# Altium PCB ProcessorBoard_STM32F103C.PcbDoc
Units mm, origin at the board's own origin, x right, y up, seen from the top; angles counter-clockwise.
Board outline 44 x 44 mm, 2 copper layers (Top Layer, Bottom Layer), stack 1.571 mm thick; 29 components, 50 nets, 159 pads, 22 vias.
Unrouted connection lines stored in the file: 12.
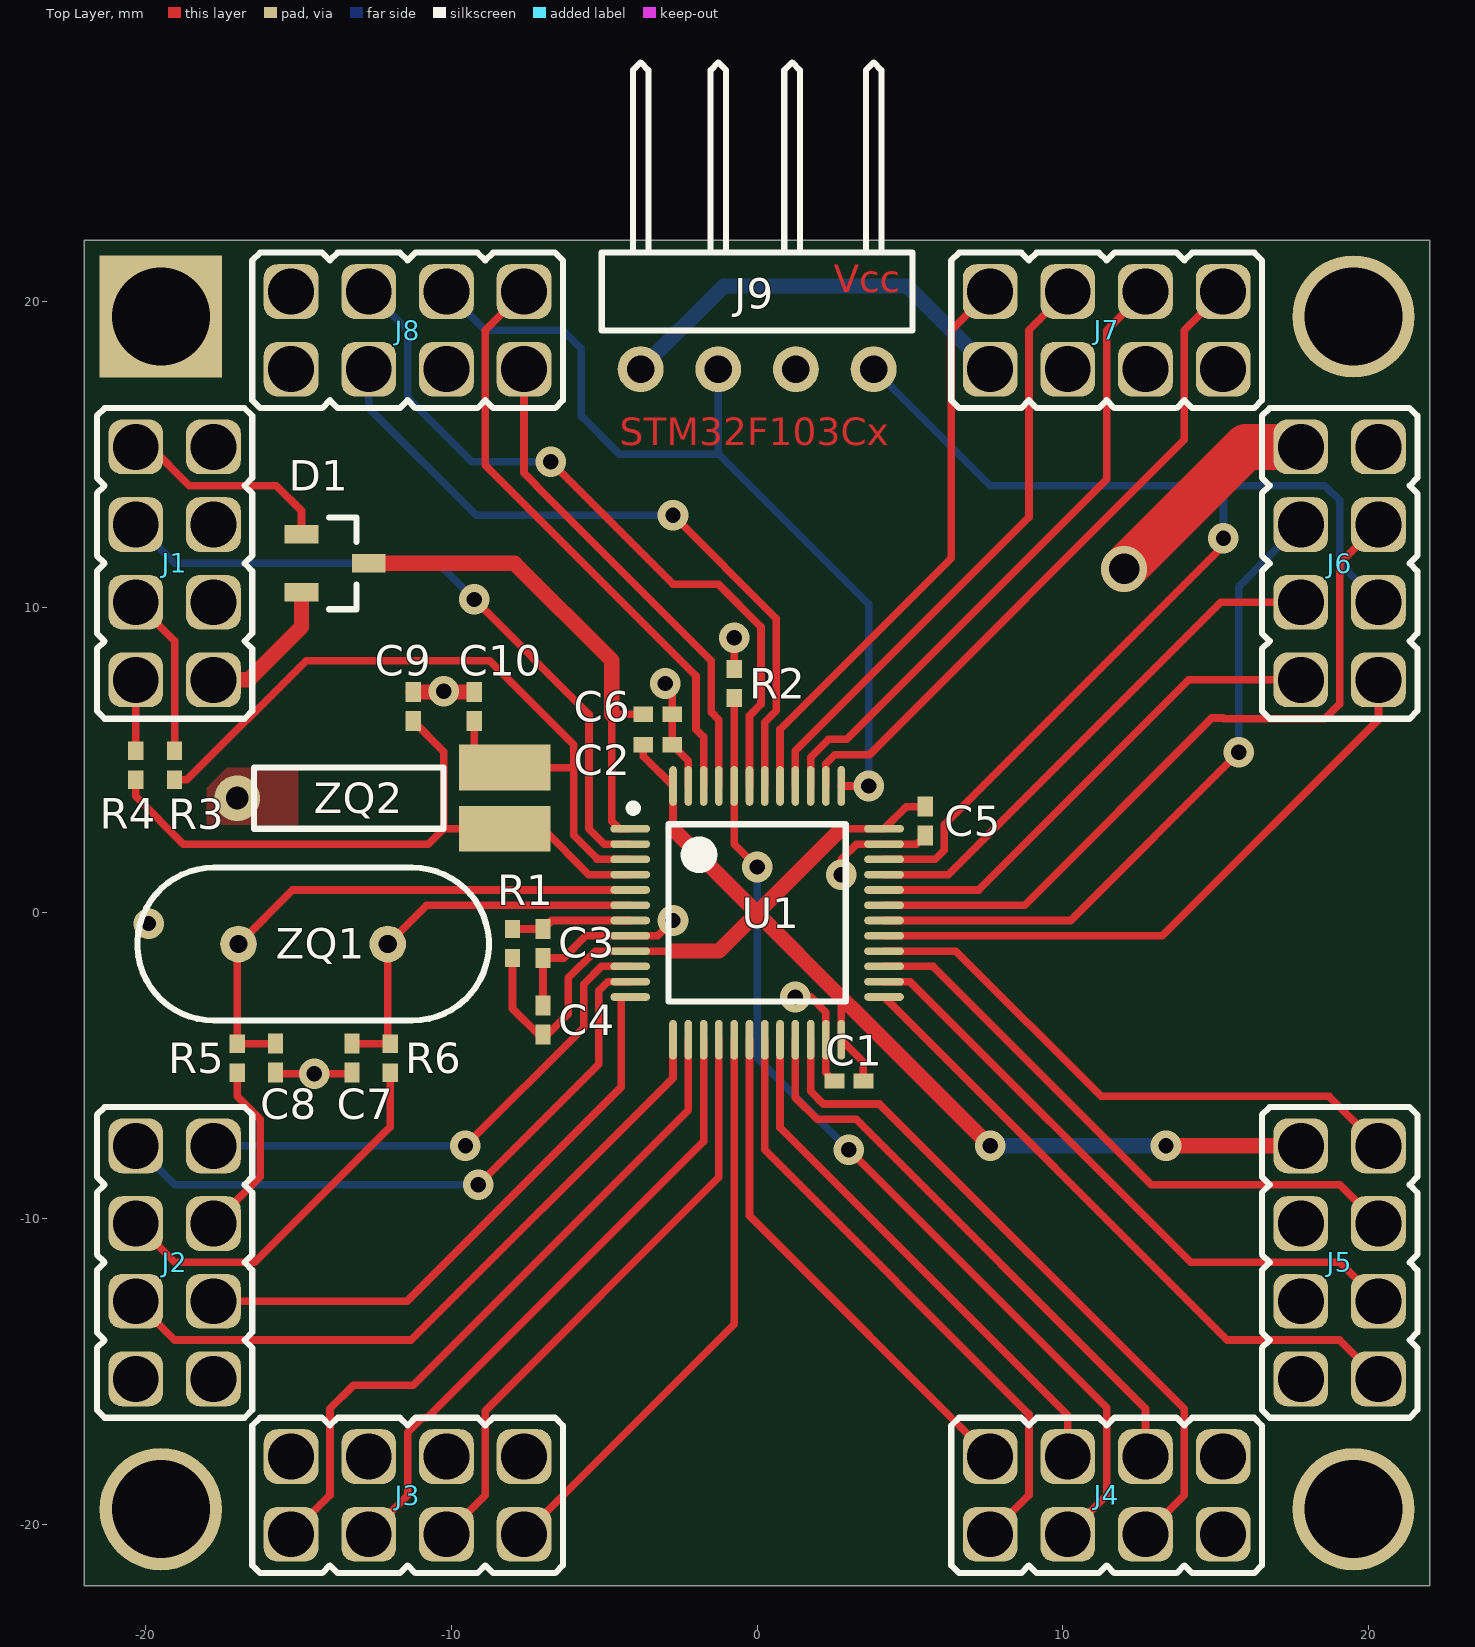
[diagram p0: Top Layer view]
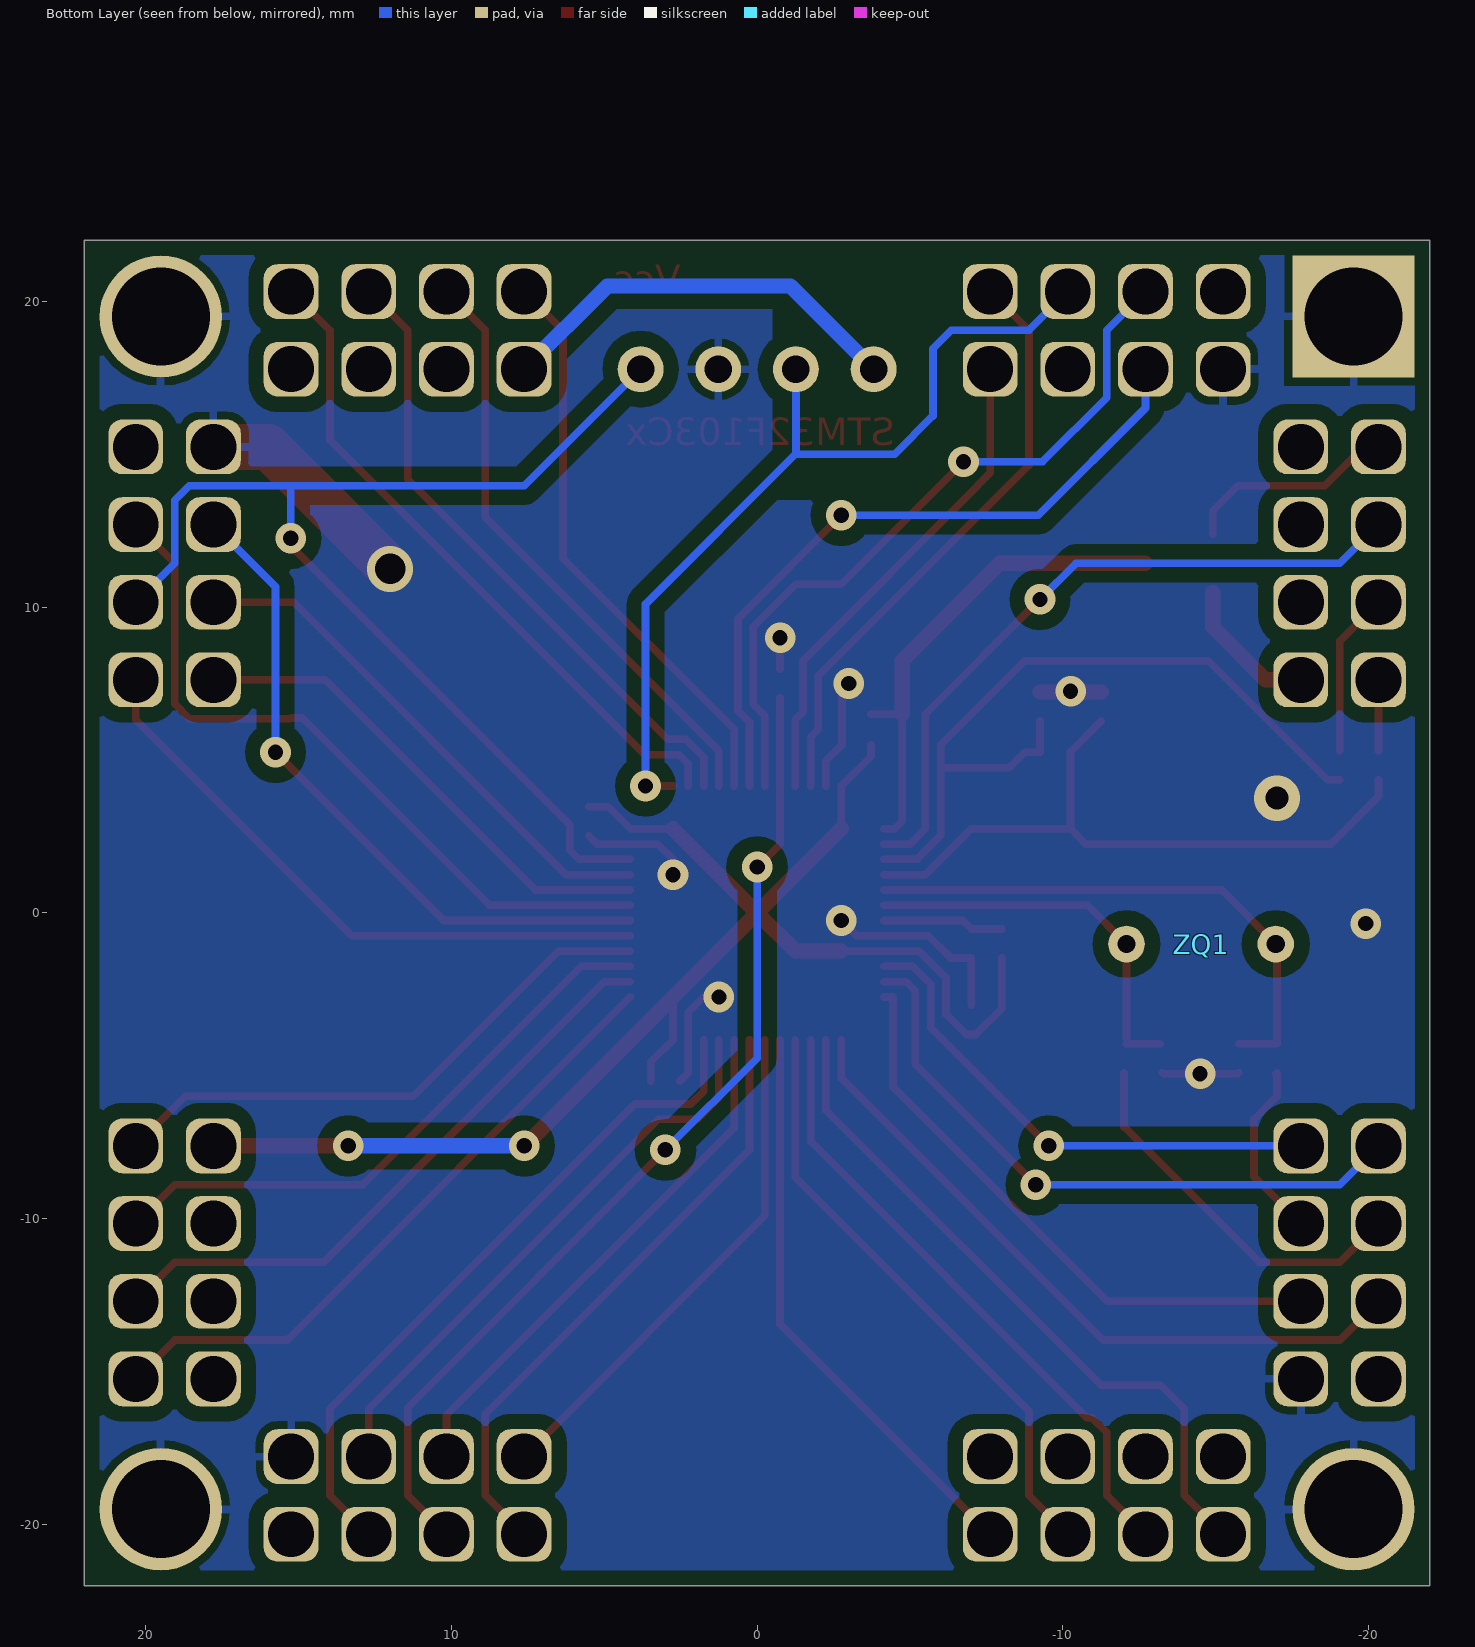
[diagram p1: Bottom Layer view, seen from below]

## Layer stack, top to bottom
Top Solder: solder mask 0.0102, Solder Resist, Dk 3.5
Top Layer: signal copper 0.0356
Dielectric 1: dielectric 1.5, FR-4, Dk 4.8
Bottom Layer: signal copper 0.0356
Bottom Solder: solder mask 0.0102, Solder Resist, Dk 3.5

## Board outline
-22,-22 22,-22 22,22 -22,22

## Design rules (kind name [scope] priority, off if disabled: settings)
Clearance Clearance_Polygon(GND) [InPolygon and InNet('GND')] p1: gap=0.5
Clearance [All] p2: gap=0.25
HoleSize HoleSize_Pad [IsPad] p1: absolutevalues=TRUE maxlimit=4 minlimit=0.5 maxpercent=80.000 minpercent=20.000
HoleSize [All] p2: absolutevalues=TRUE maxlimit=2.5 minlimit=0.3 maxpercent=80.000 minpercent=20.000
PolygonConnect PolygonConnect_Via(GND) [InNet('GND') vs IsVia] p1: connectstyle=Direct reliefconductorwidth=0.254 reliefentries=4 polygonreliefangle="90 Angle" airgapwidth=0.254
PolygonConnect [All] p2: connectstyle=Relief reliefconductorwidth=0.254 reliefentries=4 polygonreliefangle="90 Angle" airgapwidth=0.254
RoutingVias [All] p1: holewidth=0.5 width=1 viastyle="Through Hole" minholewidth=0.5 minwidth=1 maxholewidth=1.5 maxwidth=2
SolderMaskExpansion [All] p1: expansion=0.102
Width [All] p1: maxlimit=2 minlimit=0.2 preferedwidth=0.3
28 further rules are at their usual default settings.

## Components (designator, comment, footprint, x,y, rotation, side; value= is the part's Value field where it differs from the comment)
C1 "0.1/25" CAP0402 3,-5.5 r0 top
C2 "0.1/25" CAP0402 -3.25,5.5 r180 top
C3 "0.1/25" CAP0402 -7,-1 r90 top
C4 "0.1/25" CAP0402 -7,-3.5 r270 top
C5 "0.1/25" CAP0402 5.5,3 r90 top
C6 "0.1/25" CAP0402 -3.25,6.5 r180 top
C7 "18/25" CAP0402 -13.25,-4.75 r90 top
C8 "18/25" CAP0402 -15.75,-4.75 r90 top
C9 "18/25" CAP0402 -11.25,6.75 r270 top
C10 "18/25" CAP0402 -9.25,6.75 r270 top
D1 "BAT54C" SOT23 -13.8,11.43 r0 top
J1 "LEFT" PBDM-8 -19.05,11.43 r270 top
J2 "LEFT" PBDM-8 -19.05,-11.43 r270 top
J3 "BOTTOM" PBDM-8 -11.43,-19.05 r0 top
J4 "BOTTOM" PBDM-8 11.43,-19.05 r0 top
J5 "RIGHT" PBDM-8 19.05,-11.43 r90 top
J6 "RIGHT" PBDM-8 19.05,11.43 r90 top
J7 "TOP" PBDM-8 11.43,19.05 r180 top
J8 "TOP" PBDM-8 -11.43,19.05 r180 top
J9 "PLS-4R" PLS-4R 0,17.78 r180 top
R1 "22k" RES0402 -8,-1 r270 top
R2 "100k" RES0402 -0.75,7.5 r270 top
R3 "0" RES0402 -19.05,4.826 r270 top
R4 "0" RES0402 -20.32,4.826 r270 top
R5 "0" RES0402 -17,-4.75 r90 top
R6 "0" RES0402 -12,-4.75 r90 top
U1 "STM32F103CB" LQFP48 0,0 r0 top
ZQ1 "8M" HC49/U3H -14.52,-1.02 r0 bottom
ZQ2 "32.768k" D6.2x2 -10.25,3.75 r90 top

## Footprints (in the part's own frame and the unit in brackets; to place one, negate y for a bottom-side part, rotate by r counter-clockwise, add the part's x,y. Pads: shape width x height; smd on the part's side, far side on the other; paste and mask are expansions set on the pad)
CAP0402 [mm]
  rect 0.65x0.5 smd: 1(-0.475,0) 2(0.475,0)
  body extent -0.55,-0.3 0.55,0.3, height 0.5
D6.2x2 [mm] "D6.2x2 Cylindrical package"
  rect 1.5x3 smd: 1(-1,-2) 2(1,-2)
  silkscreen extent -1,0 1,6.2
HC49/U3H [mm]
  round 1.2 hole 0.6: 1(2.44,0) 2(-2.44,0)
  body extent -5.67,-2.33 5.68,2.32, height 3.5
LQFP48 [mm] "LQFP, 48-Leads, Body 7,00x7,00mm, Pitch 0,50mm, IPC High Density"
  oval 1.3x0.25 smd: 1(-4.15,2.75) 2(-4.15,2.25) 3(-4.15,1.75) 4(-4.15,1.25) 5(-4.15,0.75) 6(-4.15,0.25) 7(-4.15,-0.25) 8(-4.15,-0.75) 9(-4.15,-1.25) 10(-4.15,-1.75) 11(-4.15,-2.25) 12(-4.15,-2.75) 25(4.15,-2.75) 26(4.15,-2.25) 27(4.15,-1.75) 28(4.15,-1.25) 29(4.15,-0.75) 30(4.15,-0.25) 31(4.15,0.25) 32(4.15,0.75) 33(4.15,1.25) 34(4.15,1.75) 35(4.15,2.25) 36(4.15,2.75)
  oval 0.25x1.3 smd: 13(-2.75,-4.15) 14(-2.25,-4.15) 15(-1.75,-4.15) 16(-1.25,-4.15) 17(-0.75,-4.15) 18(-0.25,-4.15) 19(0.25,-4.15) 20(0.75,-4.15) 21(1.25,-4.15) 22(1.75,-4.15) 23(2.25,-4.15) 24(2.75,-4.15) 37(2.75,4.15) 38(2.25,4.15) 39(1.75,4.15) 40(1.25,4.15) 41(0.75,4.15) 42(0.25,4.15) 43(-0.25,4.15) 44(-0.75,4.15) 45(-1.25,4.15) 46(-1.75,4.15) 47(-2.25,4.15) 48(-2.75,4.15)
  silkscreen extent -4.17,-2.9 2.9,3.55, body extent -3.5,-3.5 3.5,3.5, height 1.6
PBDM-8 [mm] "5-pin interboard connector, pitch 2.54 mm"
  rrect50% 1.79x1.79 hole 1.5: 1(-3.81,-1.27) 2(-3.81,1.27) 3(-1.27,-1.27) 4(-1.27,1.27) 5(1.27,-1.27) 6(1.27,1.27) 7(3.81,-1.27) 8(3.81,1.27)
  silkscreen extent -5.08,-2.54 5.08,2.54, body extent -5.08,-2.54 5.08,2.54, height 3
PLS-4R [mm] "4-pin angle interboard connector, pitch 2.54 mm"
  round 1.5 hole 0.9: 1(-3.81,0) 2(-1.27,0) 3(1.27,0) 4(3.81,0)
  silkscreen extent -5.08,-10.03 5.08,-1.27, body extent -5.08,-9.91 5.08,0.31, height 2.44
RES0402 [mm]
  rect 0.6x0.5 smd: 1(-0.475,0) 2(0.475,0)
  body extent -0.53,-0.28 0.53,0.28, height 0.35
SOT23 [mm]
  rect 1.1x0.6 smd: 1(-1.1,0.95) 2(-1.1,-0.95) 3(1.1,0)
  silkscreen extent -0.2,-1.5 0.7,1.5, body extent -1.15,-1.5 1.15,1.5, height 1.1

## Part data
C1 C2 C3 C4 C5 C6 C7 C8 C9 C10: library part CAP0402, "Ceramic chip capacitor 0402"
D1: "Schottky diode"
J1 J2 J3 J4 J5 J6 J7 J8: library part PBDM-8, "2x4-pin header, pitch 2.54 mm"
J9: "4-pin angle header, pitch 2.54 mm"
R1 R2 R3 R4 R5 R6: library part RES0402, "Ceramic chip resistor"
U1: "General purpose 32-bit microcontroller"
ZQ1: library part KX-3H, "Quartz crystal in low profile package"
ZQ2: library part KX-26, "Quartz crystal in cylindrical package"

## Free pads (board coordinates)
  round 4 hole 3.2: 0(-19.5,-19.5) 0(19.5,-19.5) 0(19.5,19.5)
  rect 4x4 hole 3.2: 0(-19.5,19.5)

## Via types
v1: diameter 1, hole 0.5, Top Layer to Bottom Layer, 20 vias
v2: diameter 1.5, hole 1, Top Layer to Bottom Layer, 1 vias
v3: diameter 1.5, hole 0.75, Top Layer to Bottom Layer, 1 vias

## Nets (pads, with @x,y where several pads share a name; then routed paths per layer and width w, separated by ;. In a path a pad name is that pad's centre, name@x,y a point inside that pad or via, vN(x,y) a via of type N, cw(c..) or ccw(c..) an arc to the next point about the centre after c; other vN are vias at no path point)
+5V: J1.6 J3.6 J5.6 J7.6
+12V: J1.2 J3.2 J5.2 J7.2
BOOT0: J4.3 R2.2 U1.44 | length 32.9
  Top Layer w0.25: R2.2 -0.75,2.25 v1(0,1.5) ; v1(3,-7.75) 11.43,-16.18 11.43,-19.05 J4.3
  Bottom Layer w0.25: v1(0,1.5) 0,-4.75 v1(3,-7.75)
GND: C1.1 C2.1 C3.1 C4.1 C5.1 C6.1 C7.1 C8.1 C9.1 C10.1 J2.8 J4.8 J6.8 J8.8 J9.2 pad.0 R2.1 U1.8 U1.23 U1.35 U1.47 | length 30.1
  Top Layer w0.25: C8.1 -15.71,-5.265 v1(-14.485,-5.265) -13.29,-5.265 C7.1 ; C4.1 C3.1 -6.325,-1.475 -5.6,-0.75 -3.25,-0.75 v1(-2.75,-0.25) ; v1(-3,7.5) -2.775,7.275 C2.1 -2.25,4.975 U1.47 ; R2.1 v1(-0.75,9) ; v1(1.25,-2.75) 1.75,-2.75 2.25,-3.25 2.25,-5.225 C1.1 ; v1(2.75,1.25) 2.75,1.75 3.25,2.25 5.225,2.25 C5.1
  Top Layer w0.5: C9.1 C10.1
  Top Layer w1.5: v2(12,11.25) 15.99,15.24 J6.8
  other v1: -19.9,-0.35 -10.25,7.25
  other v3: -17,3.75
NetC6_2: C6.2 D1.3 U1.1 | length 16.2
  Top Layer w0.25: U1.1 -4.5,2.75 -4.75,3 -4.75,6.5 C6.2
  Top Layer w0.5: D1.3 -7.93,11.43 -4.75,8.25 -4.75,6.5
NetC7_2: C7.2 R6.2 U1.6 ZQ1.1 | length 12.6
  Top Layer w0.25: C7.2@-13.18,-4.275 R6.2@-12.08,-4.275 ; R6.2@-12.08,-4.105 ZQ1.1 -10.81,0.25 U1.6
NetC8_2: C8.2 R5.2 U1.5 ZQ1.2 | length 18
  Top Layer w0.25: R5.2 -17,-1.06 ZQ1.2 -15.19,0.75 U1.5 ; R5.2@-16.96,-4.235 -16.92,-4.275 C8.2
NetC9_2: C9.2 R4.2 U1.4 ZQ2.1 | length 22.1
  Top Layer w0.25: R4.2 -20.32,3.81 -18.76,2.25 -10.75,2.25 -10.25,2.75 ; C9.2 -10.25,5.275 -10.25,2.75 ; U1.4 -5.5,1.25 -7,2.75 ZQ2.1 -10.25,2.75
NetC10_2: C10.2 R3.2 U1.3 ZQ2.2 | length 25.4
  Top Layer w0.25: R3.2 -18.649,4.351 -14.75,8.25 -8.75,8.25 -6,5.5 -6,4.75 ; C10.2 -9.25,5.25 -8.75,5.25 ZQ2.2 -6,4.75 ; U1.3 -5.25,1.75 -5.25,1.793 -6,2.543 -6,4.75
NRST: C3.2 R1.1 U1.7 | length 4
  Top Layer w0.25: R1.1 C3.2 -6.725,-0.25 U1.7
PA0/ADC12_IN0: J2.2 U1.10 | length 16.9
  Top Layer w0.25: v1(-9.54,-7.62) -5.675,-3.755 -5.675,-2.336 -5.089,-1.75 U1.10
  Bottom Layer w0.25: J2.2 v1(-9.54,-7.62)
PA1/ADC12_IN1: J2.1 U1.11 | length 20.9
  Top Layer w0.25: v1(-9.115,-8.89) -5.175,-4.95 -5.175,-2.543 -4.882,-2.25 U1.11
  Bottom Layer w0.25: J2.1 -19.05,-8.89 v1(-9.115,-8.89)
PA2/USART2_TX: J2.6 U1.12 | length 19.5
  Top Layer w0.25: J2.6 -11.45,-12.7 -4.445,-5.695 -4.445,-2.75 U1.12
PA3/USART2_RX: J2.5 U1.13 | length 22.9
  Top Layer w0.25: J2.5 -19.05,-13.97 -11.32,-13.97 -2.75,-5.4 U1.13
PA4/SPI1_NSS: J3.1 U1.14 | length 22.7
  Top Layer w0.25: J3.1 -13.97,-19.05 -13.97,-16.22 -13.2,-15.45 -11.25,-15.45 -2.25,-6.45 U1.14
PA5/SPI1_SCK: J3.3 U1.15 | length 20.8
  Top Layer w0.25: J3.3 -11.43,-19.05 -11.43,-16.992 -10.948,-16.51 -10.785,-16.51 -1.75,-7.475 U1.15
PA6/SPI1_MISO: J3.5 U1.16 | length 19.9
  Top Layer w0.25: J3.5 -8.89,-19.05 -8.89,-16.29 -1.25,-8.65 U1.16
PA7/SPI1_MOSI: J3.7 U1.17 | length 19
  Top Layer w0.25: J3.7 -0.75,-13.45 U1.17
PA8/MCO: J6.1 U1.29 | length 20.4
  Top Layer w0.25: U1.29 13.25,-0.75 20.32,6.32 J6.1
PA9/USART1_TX: J6.6 U1.30 | length 22.4
  Top Layer w0.25: U1.30 10.25,-0.25 v1(15.75,5.25) v1@15.75,5.5
  Bottom Layer w0.25: v1(15.75,5.25) 15.75,10.67 J6.6
PA10/USART1_RX: J6.5 U1.31 | length 24
  Top Layer w0.25: U1.31 8.75,0.25 14.875,6.375 15.24,6.375 15.265,6.35 18.568,6.35 19.05,6.832 19.05,10.948 19.05,11.43 J6.5
PA11/USBDM: J6.2 U1.32 | length 16.5
  Top Layer w0.25: U1.32 7.25,0.75 14.12,7.62 J6.2
PA12/USBDP: J6.4 U1.33 | length 17.3
  Top Layer w0.25: U1.33 6.25,1.25 15.16,10.16 J6.4
PA13/SWDIO: J6.3 J9.1 U1.34 | length 38.7
  Top Layer w0.25: U1.34 5.83,1.75 6.125,2.045 6.125,2.875 15.25,12 v1(15.25,12.25)
  Bottom Layer w0.25: J9.1 7.62,13.97 15.25,13.97 ; v1(15.25,12.25) 15.25,13.97 ; J6.3 19.05,11.43 19.05,11.912 19.05,13.488 18.568,13.97 15.25,13.97
PA14/SWCLK: J8.3 J9.3 U1.37 | length 29
  Top Layer w0.25: U1.37 v1(3.65,4.15)
  Bottom Layer w0.25: J8.3 -8.89,19.05 -6.35,19.05 -5.75,18.45 -5.75,16.25 -4.5,15 -1.27,15 ; J9.3 -1.27,15 ; v1(3.65,4.15) 3.65,10.1 -1.25,15 -1.27,15
PA15/(SPI1_NSS): J7.1 U1.38 | length 22.2
  Top Layer w0.25: U1.38 2.25,4.882 2.543,5.175 3.675,5.175 13.97,15.47 13.97,19.05 J7.1
PB0/ADC12_IN8: J4.2 U1.18 | length 16.9
  Top Layer w0.25: U1.18 -0.25,-9.91 J4.2
PB1/ADC12_IN9: J4.1 U1.19 | length 20.3
  Top Layer w0.25: U1.19 0.25,-7.75 8.89,-16.39 8.89,-19.05 J4.1
PB2/BOOT1: J4.4 U1.20 | length 17.5
  Top Layer w0.25: U1.20 0.75,-7.025 10.16,-16.435 J4.4
PB3/(SPI1_SCK): J7.3 U1.39 | length 21.1
  Top Layer w0.25: U1.39 1.75,5.089 2.336,5.675 2.925,5.675 11.43,14.18 11.43,19.05 J7.3
PB4/(SPI1_MISO): J7.5 U1.40 | length 19.9
  Top Layer w0.25: U1.40 1.25,5.296 8.89,12.936 8.89,19.05 J7.5
PB5/(SPI1_MOSI): J7.7 U1.41 | length 19
  Top Layer w0.25: U1.41 0.75,4.882 0.75,6 6.35,11.6 6.35,19.05 J7.7
PB6/I2C1_SCL/(USART1_TX): J8.6 U1.42 | length 23.1
  Top Layer w0.25: v1(-2.75,13) 0.625,9.625 0.625,6.613 0.25,6.238 U1.42
  Bottom Layer w0.25: J8.6 -12.7,16.51 -9.19,13 v1(-2.75,13)
PB7/I2C1_SDA/(USART1_RX): J8.5 U1.43 | length 24
  Top Layer w0.25: v1(-6.75,14.75) -2.75,10.75 -1.263,10.75 0.125,9.362 0.125,6.82 -0.25,6.445 U1.43
  Bottom Layer w0.25: J8.5 -11.43,19.05 -11.43,16.85 -9.33,14.75 v1(-6.75,14.75)
PB8/(I2C1_SCL/CANRX): J8.2 U1.45 | length 16.3
  Top Layer w0.25: J8.2 -7.625,17.775 -7.625,14.388 -7.22,13.983 -7.22,13.97 -1.5,8.25 -1.5,6.57 -1.25,6.32 U1.45
PB9/(I2C1_SDA/CANTX): J8.1 U1.46 | length 19.7
  Top Layer w0.25: J8.1 -8.89,19.05 -8.89,14.64 -2,7.75 -2,6 -1.75,5.75 U1.46
PB10/USART3_TX/I2C2_SCL: J4.6 U1.21 | length 19.1
  Top Layer w0.25: U1.21 1.25,-6.037 1.963,-6.75 3.237,-6.75 12.7,-16.213 J4.6
PB11/USART3_RX/I2C2_SDA: J4.5 U1.22 | length 22.8
  Top Layer w0.25: U1.22 1.75,-5.83 2.17,-6.25 4,-6.25 13.97,-16.22 13.97,-19.05 J4.5
PB12/SPI2_NSS: J5.1 U1.25 | length 21.3
  Top Layer w0.25: U1.25 15.37,-13.97 19.05,-13.97 J5.1
PB13/SPI2_SCK: J5.3 U1.26 | length 20.5
  Top Layer w0.25: U1.26 5,-2.25 14.18,-11.43 19.05,-11.43 J5.3
PB14/SPI2_MISO: J5.5 U1.27 | length 19.7
  Top Layer w0.25: U1.27 5.75,-1.75 12.89,-8.89 19.05,-8.89 J5.5
PB15/SPI2_MOSI: J5.7 U1.28 | length 18.8
  Top Layer w0.25: U1.28 6.5,-1.25 11.25,-6 18.7,-6 J5.7
PC13: J1.3 U1.2 | length 22.7
  Top Layer w0.25: v1(-9.25,10.25) -5.5,6.5 -5.5,4.9 -5.5,2.75 -5,2.25 U1.2
  Bottom Layer w0.25: J1.3 -19.05,11.43 -10.43,11.43 v1(-9.25,10.25)
PC14: J1.5 R3.1 | length 5.4
  Top Layer w0.25: J1.5 -19.05,8.89 R3.1
PC15: J1.7 R4.1 | length 2.3
  Top Layer w0.25: R4.1 J1.7
PD0: J2.4 R5.1 | length 5.9
  Top Layer w0.25: J2.4 -16.25,-8.63 -16.25,-6.75 -17,-6 R5.1 ; R5.1@-16.963,-5.262 R5.1@-16.96,-5.259
PD1: J2.3 R6.1 | length 12.5
  Top Layer w0.25: J2.3 -19.05,-11.43 -16.43,-11.43 -12,-7 R6.1
VBAT: J1.4 J3.4 J5.4 J7.4
VBKUP: D1.1 J1.1 | length 7.1
  Top Layer w0.25: J1.1 -19.838,15.24 -18.568,13.97 -15.72,13.97 -14.9,13.15 D1.1
VCC: C1.2 C2.2 C4.2 C5.2 D1.2 J1.8 J3.8 J5.8 J7.8 J9.4 R1.2 U1.9 U1.24 U1.36 U1.48 | length 68.7
  Top Layer w0.25: R1.2 -8,-3.13 -7.155,-3.975 -6.845,-3.975 -6.175,-3.305 -6.175,-2.75 -6.175,-2.129 -5.296,-1.25 U1.9 -2.75,-1.25 ; C2.2 -3.725,5.125 U1.48 -2.75,2.75 ; 2.75,-2.759 U1.24 3.475,-4.875 C1.2 ; 2.75,2.75 U1.36 4.875,3.475 C5.2
  Top Layer w0.5: J1.8 -16.63,7.62 -14.9,9.35 D1.2 ; -2.75,-1.25 -1.25,-1.25 0,0 ; -2.75,2.75 0,0 ; 2.75,2.75 0,0 ; v1(7.62,-7.62) 7.611,-7.62 3.325,-3.334 2.75,-2.759 0,-0.009 0,0 ; v1(13.37,-7.62) J5.8
  Bottom Layer w0.5: J9.4 -1.09,20.5 4.9,20.5 J7.8 ; v1(7.62,-7.62) v1(13.37,-7.62)
pads on no net: J2.7 J4.7 J6.7 J8.4 J8.7

## Polygon pours and split planes (outlines as drawn)
GND on Bottom Layer "Bottom-GND" (solid, remove dead copper, pour order 2): -21.5,21.5 21.5,21.5 21.5,-21.5 -21.5,-21.5
GND on Top Layer "Top-GND" (solid, remove dead copper, pour order 3): -15,4.75 -15,2.75 -18,2.75 -18,4.75

## Other copper
Top Layer:
  text "Vcc" at 2.5,20 h1.52
  text "STM32F103Cx" at -4.5,15 h1.52
Bottom Layer:
  pour cut-out: -0.5,13.5 -0.5,20 -6.5,20 -6.5,13.5

## Silkscreen, mask and mechanical layers (free items; w line width, h text height)
Board:
  the board outline again, w0.2